# Altium PCB Terra_Spray.PcbDoc
Units mm, origin at the board's own origin, x right, y up, seen from the top; angles counter-clockwise.
Board outline 45.2 x 39.03 mm, 4 copper layers (Top Layer, GND, Power, Bottom Layer), stack 1.57 mm thick; 61 components, 32 nets, 213 pads, 377 vias.
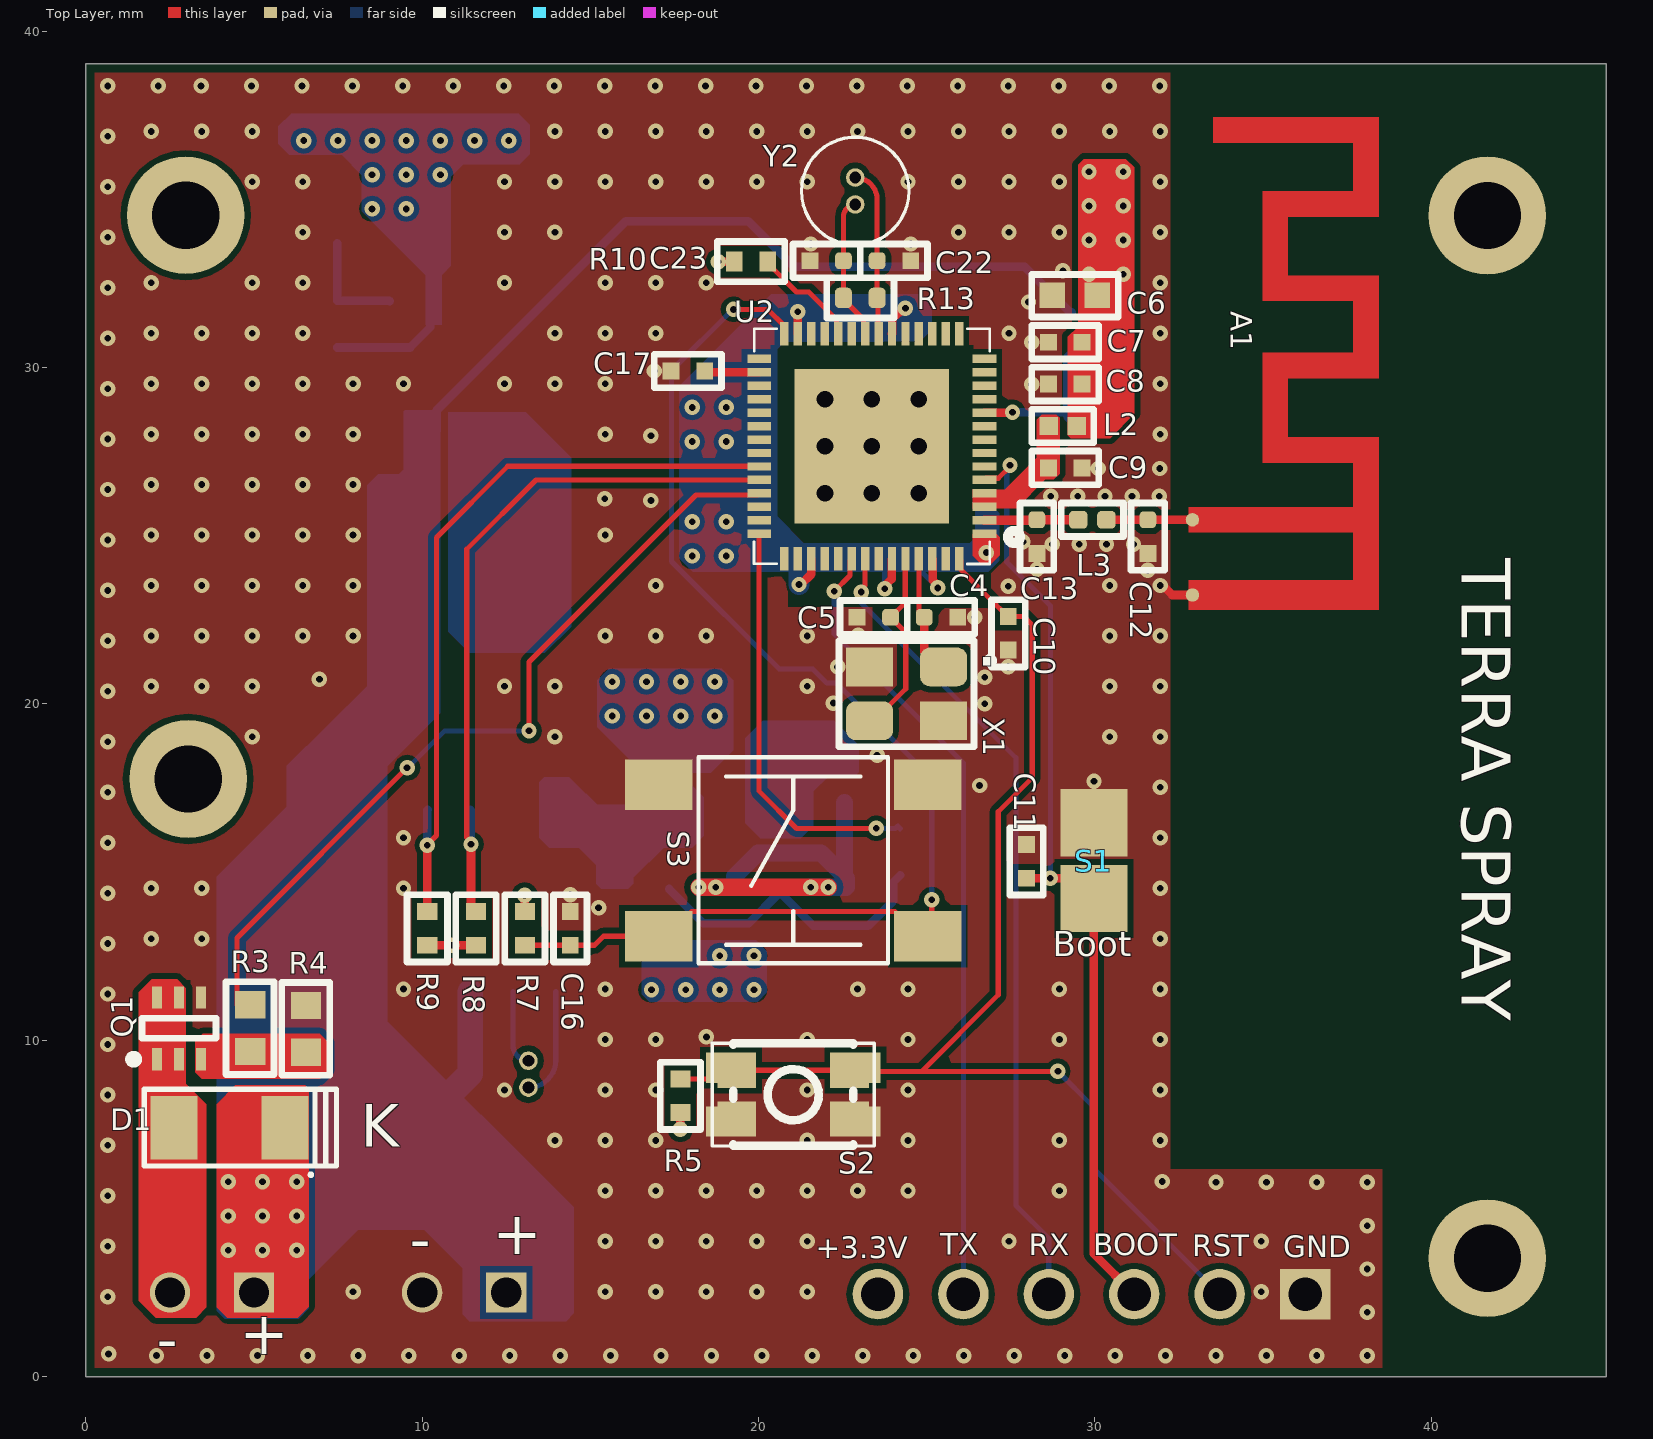
[diagram p0: Top Layer view]
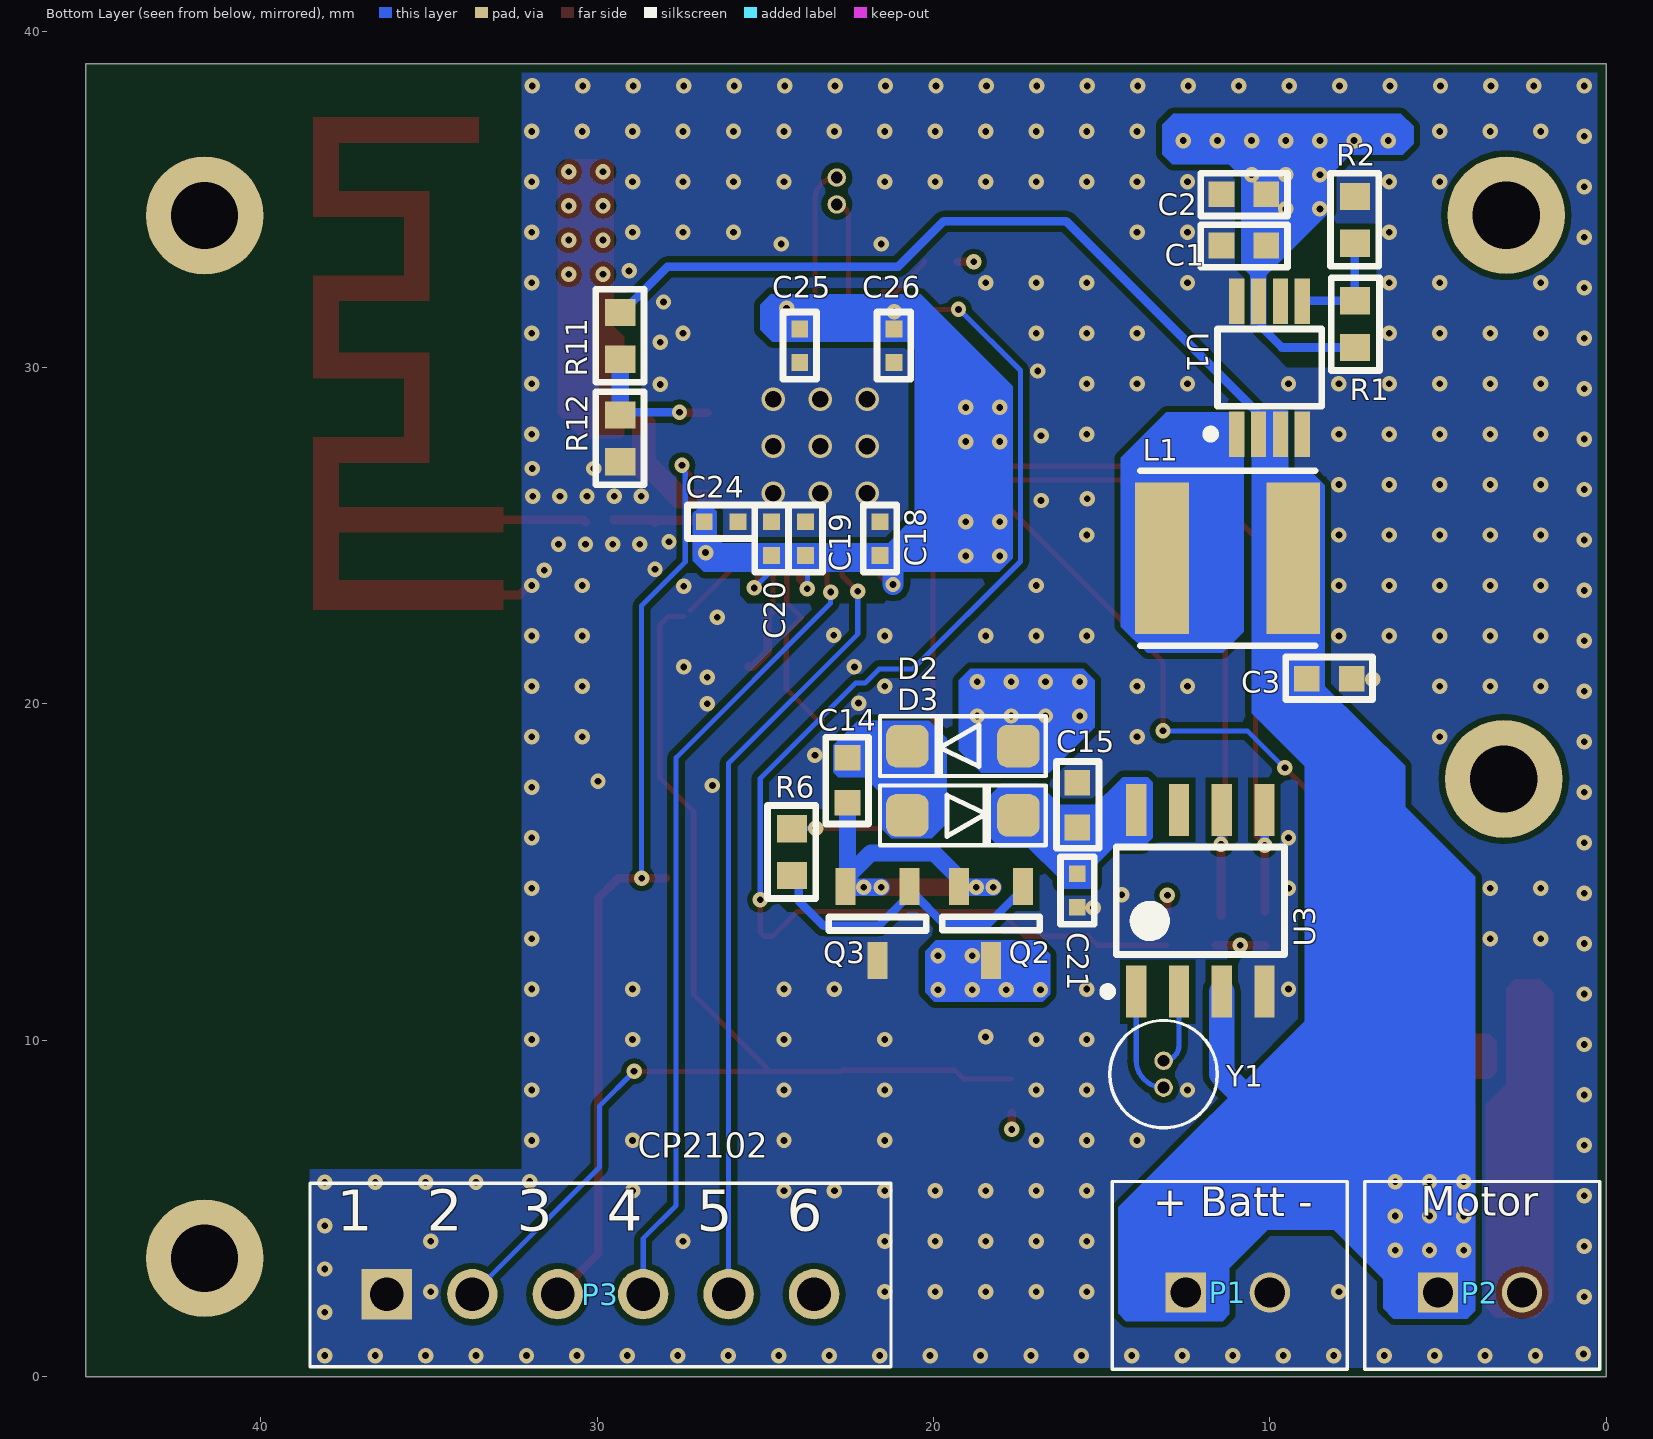
[diagram p1: Bottom Layer view, seen from below]
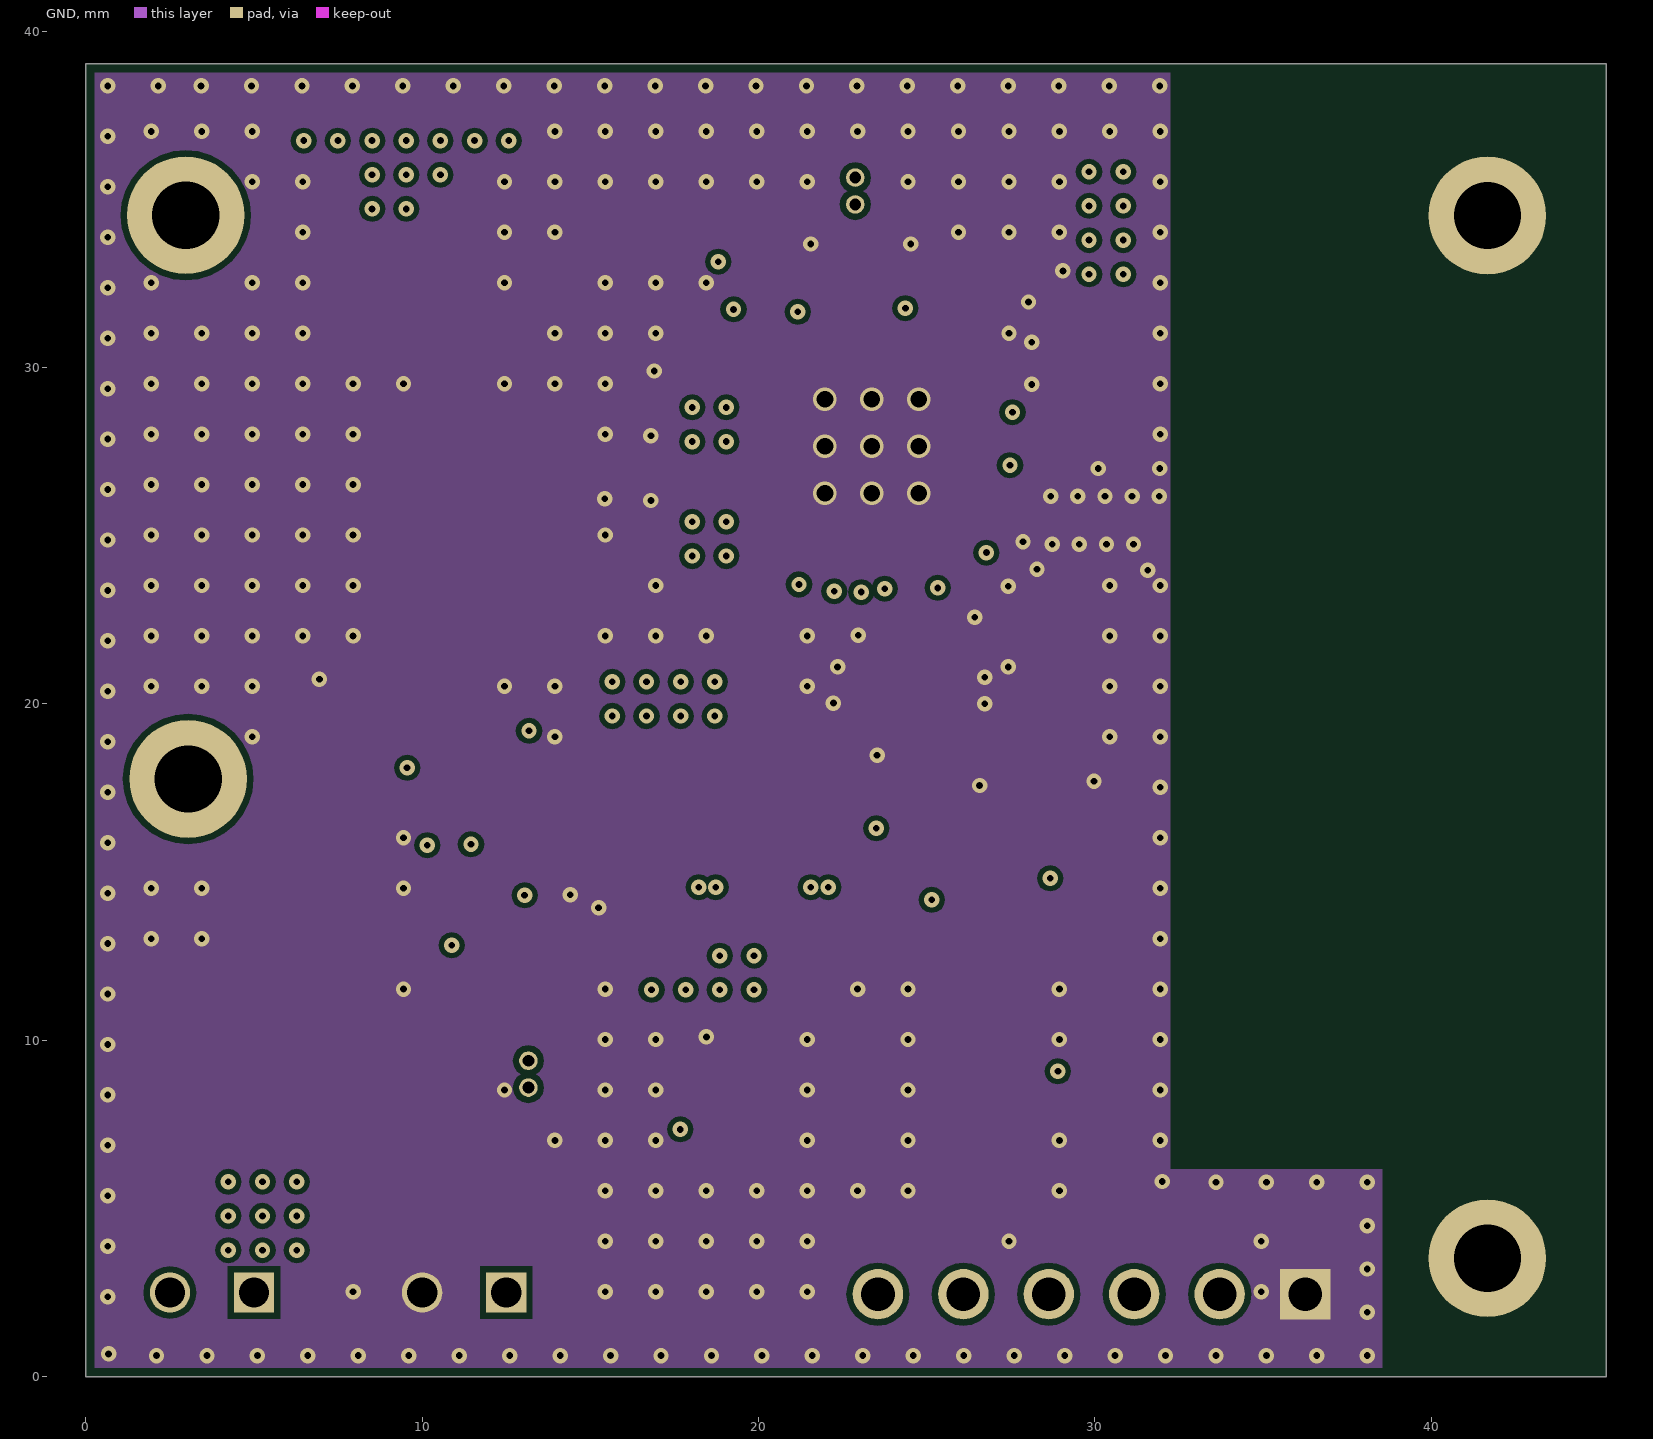
[diagram p2: GND]
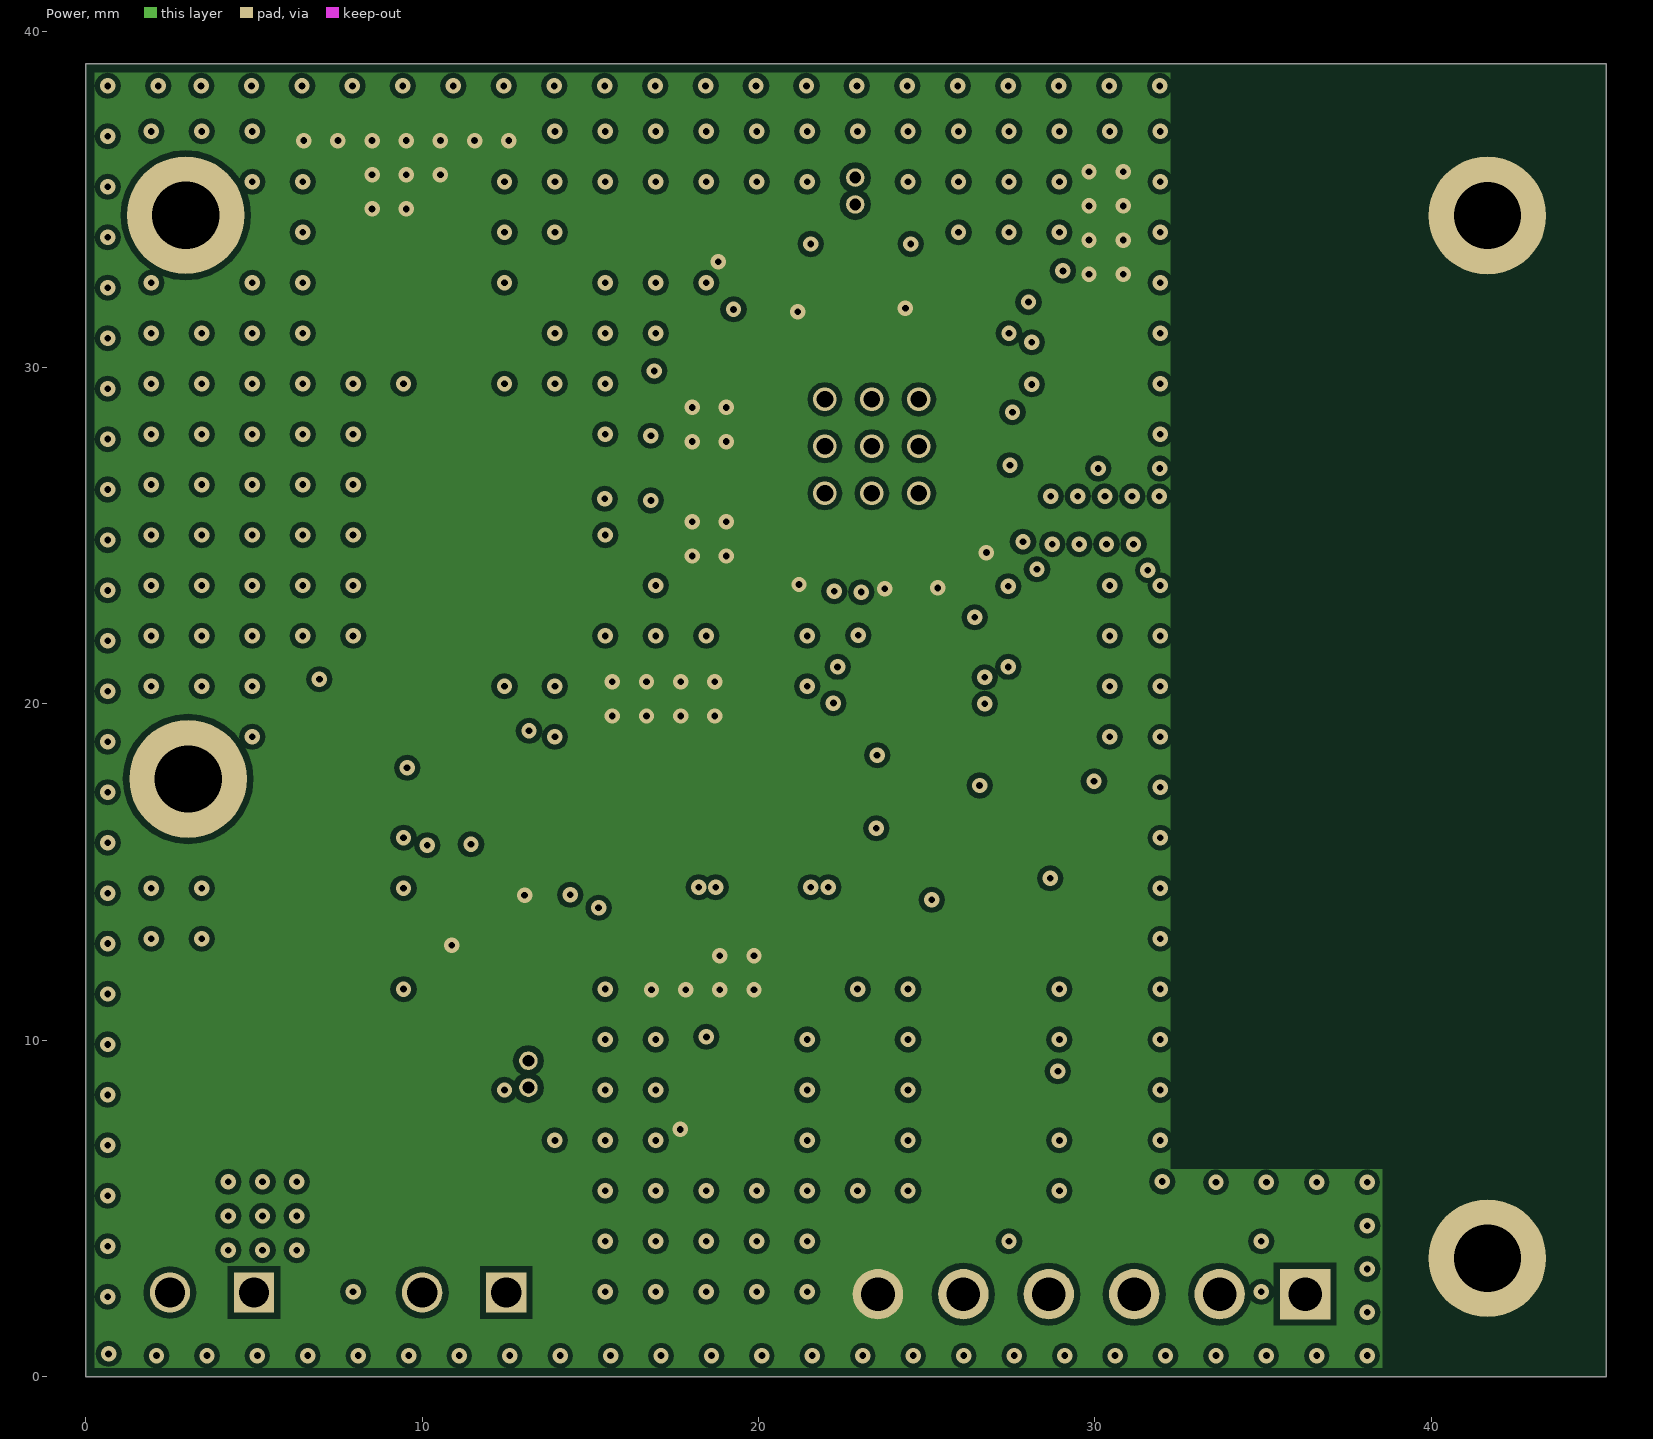
[diagram p3: Power]

## Layer stack, top to bottom
Top Solder: solder mask 0.0102, Solder Resist, Dk 3.5
Top Layer: signal copper 0.035
Dielectric 2: prepreg 0.0175, PP-006, Dk 4.1
GND: signal copper 0.2
Dielectric 1: dielectric 1.065, FR-4, Dk 4.8
Power: signal copper 0.2
Dielectric 3: prepreg 0.0175, PP-006, Dk 4.1
Bottom Layer: signal copper 0.035
Bottom Solder: solder mask 0.0102, Solder Resist, Dk 3.5

## Board outline
0,0 0,39.03 45.2,39.03 45.2,0

## Design rules (kind name [scope] priority, off if disabled: settings)
BoardOutlineClearance [All] p1: gap=0.254 ignorepadtopadclearanceinfootprint=FALSE except(0: Arc-SplitContinuation Track-SplitContinuation SMDPad-SplitContinuation THPad-SplitContinuation Via-SplitContinuation Fill-SplitContinuation Poly-SplitContinuation Region-SplitContinuation Text-SplitContinuation)
Clearance [All] p1: gap=0.178 ignorepadtopadclearanceinfootprint=TRUE except(0.127: Arc-SMDPad Track-SMDPad; 0.152: Track-Track Track-Region SMDPad-Region Via-Poly; 0.254: Arc-Arc Arc-Track)
MinimumSolderMaskSliver [All] p1: minsoldermaskwidth=0.025
PolygonConnect [All] p1: connectstyle=Direct reliefconductorwidth=0.254 reliefentries=4 polygonreliefangle="90 Angle" airgapwidth=0.254
RoutingVias [All] p1: holewidth=0.356 width=0.711 viastyle="Through Hole" minholewidth=0.2 minwidth=0.457 maxholewidth=0.711 maxwidth=1.27
SilkToSilkClearance [All] p1: silktosilkclearance=0.025
SilkToSolderMaskClearance [IsPad] p1: minsilkscreentomaskgap=0 clearancetoexposedcopper=TRUE
SolderMaskExpansion [All] p1: expansion=0.102 istentingtop=FALSE
Width [All] p1: maxlimit=1.016 minlimit=0.152 preferedwidth=0.152 minimp=50.000000 maximp=50.000000 favimp=50.000000
27 further rules are at their usual default settings.

## Components (designator, comment, footprint, x,y, rotation, side; value= is the part's Value field where it differs from the comment)
A1 "Antenna_1" "ESP32 ANT" 32.9,24.357 r270 top
C1 "Capacitor" CAPC0603 10.77,33.63 r180 bottom value=22uF
C2 "Capacitor" CAPC0603 10.77,35.154 r180 bottom value=22uF
C3 "Capacitor" CAPC0603 8.23,20.752 r0 bottom value=22uF
C4 "Cap" CAPC0402#1 25.425,22.575 r180 top value=22pF
C5 "Cap" CAPC0402#1 23.425,22.575 r0 top value=22pF
C6 "Capacitor" CAPC0603 29.4,32.15 r0 top value=10uF
C7 "Capacitor" CAPC0402#2 29.119,30.753 r0 top value=1uF
C8 "Cap" CAPC0402#2 29.119,29.508 r0 top value=100nF
C9 "Cap" CAPC0402#2 29.119,27.019 r0 top value=100nF
C10 "Cap" CAPC0402#2 27.426,22.099 r270 top value=100nF
C11 "Cap" CAPC0402#2 27.965,15.316 r270 top value=100nF
C12 "Capacitor" CAPC0402#1 31.575,24.975 r90 top
C13 "Capacitor" CAPC0402#1 28.275,24.975 r90 top
C14 "Capacitor" CAPC0603 22.555,17.729 r270 bottom value=10uF
C15 "Capacitor" CAPC0603 15.723,16.993 r90 bottom value=10uF
C16 "Cap" CAPC0402#2 14.402,13.325 r270 top value=100nF
C17 "Cap" CAPC0402#2 17.9,29.9 r180 top value=100nF
C18 "Cap" CAPC0402#2 21.59,24.917 r90 bottom value=100nF
C19 "Cap" CAPC0402#2 23.8,24.917 r90 bottom value=100nF
C20 "Cap" CAPC0402#2 24.816,24.917 r90 bottom value=100nF
C21 "Cap" CAPC0402#2 15.723,14.453 r270 bottom value=100nF
C22 "Cap" capc0402 24.025,33.175 r180 top value=18pF
C23 "Cap" capc0402 22.025,33.175 r0 top value=18pF
C24 "Cap" CAPC0402#2 26.314,25.417 r180 bottom value=100nF
C25 "Cap" CAPC0402#2 23.975,30.65 r270 bottom value=100nF
C26 "Cap" CAPC0402#2 21.175,30.65 r270 bottom value=100nF
D1 "1N4007W" SOD-123 4.275,7.4 r180 top
D2 "B0540W" "SOD123 - DUPLICATE" 19.126,18.745 r0 bottom
D3 "B0540W" "SOD123 - DUPLICATE" 19.126,16.688 r180 bottom
L1 "Inductor" INDP5050X20N 11.252,24.333 r0 bottom value=2.2uH-3A
L2 "Inductor" "INDUCTOR 0402"#1 29.044,28.264 r0 top
L3 "Inductor" "INDUCTOR 0402"#2 29.925,25.475 r0 top
P1 "+ Batt -" "2 PIN 2.5MM - HEADER" 11.25,2.5 r180 bottom
P2 "Motor" "2 PIN 2.5MM - HEADER" 3.75,2.5 r180 bottom locked
P3 "CP2102" "HEADER 6X1" 29.9,2.45 r180 bottom
Q1 "Mosfet" SOT-363 2.768,10.356 r90 top
Q2 "NPN BJT Transistor" SOT-23 18.288,13.473 r270 bottom
Q3 "PNP BJT Transistor" SOT-23 21.666,13.465 r270 bottom
R1 "Resistor" RESC0603 7.468,31.293 r270 bottom value=453K
R2 "Resistor" RESC0603 7.468,34.393 r90 bottom value=100K
R3 "Resistor" RESC0603 4.89,10.362 r90 top value=100E
R4 "Resistor" RESC0603 6.547,10.338 r90 top value=100K
R5 "Resistor" RESC0402#1 17.675,8.35 r90 top value=10K
R6 "Resistor" RESC0603 24.206,15.596 r90 bottom value=820E
R7 "Resistor" RESC0402#1 13.051,13.325 r270 top value=10K
R8 "Resistor" RESC0402#1 11.601,13.325 r90 top value=10K
R9 "Resistor" RESC0402#1 10.15,13.325 r90 top value=10K
R10 "Resistor" RESC0402#1 19.775,33.15 r180 top value=10K
R11 "Resistor" RESC0603 29.311,30.946 r90 bottom value=220K
R12 "Resistor" RESC0603 29.311,27.898 r90 bottom value=309K
R13 "Resistor" RESC0402#2 23.025,32.075 r0 top value=1M
S1 "Boot" ? 29.972,15.342 r270 top
S2 "Button" 434153017835 21.031,8.382 r180 top locked value=RESET
S3 "WIFI" "FSMJ - SMD - WIFI" 21.031,15.342 r90 top
U1 "PAM2401SCADJ" "8-TSSOP, 8-MSOP" 10.008,29.997 r90 bottom
U2 "ESP32-S2" QFN56-7X7MM 23.368,27.661 r180 top
U3 "DS1307Z+" SOIC-8 12.065,14.148 r90 bottom
X1 "CRYSTAL_1" CRYSTAL_3225 24.4,20.3 r180 top
Y1 "32.768KHz" 32.728KHZ 13.157,8.992 r270 bottom
Y2 "32.768KHz" 32.728KHZ 22.875,35.25 r270 top

## Footprints (in the part's own frame and the unit in brackets; to place one, negate y for a bottom-side part, rotate by r counter-clockwise, add the part's x,y. Pads: shape width x height; smd on the part's side, far side on the other; paste and mask are expansions set on the pad)
"2 PIN 2.5MM - HEADER" [mm]
  rect 1.2x1.2 hole 0.9: 1(-1.25,0)
  round 1.2 hole 0.9: 2(1.25,0)
  silkscreen extent -3.43,-2.29 3.56,3.3, body extent -2.54,-1.27 2.54,1.27, height 8.49
"8-TSSOP, 8-MSOP" [mm] "TSOP, 8-Leads, Body 3.00x3.00mm, Pitch 0.65mm, IPC Medium Density"
  rect 1.35x0.45 smd: 1(-1.975,0.975) 2(-1.975,0.325) 3(-1.975,-0.325) 4(-1.975,-0.975) 5(1.975,-0.975) 6(1.975,-0.325) 7(1.975,0.325) 8(1.975,0.975)
  silkscreen extent -2.1,-1.55 1.15,1.88, body extent -2.45,-1.55 2.45,1.55, height 1.1
32.728KHZ [mm]
  round 0.55 hole 0.35: 1(-0.4,0) 2(0.4,0)
  silkscreen extent -1.6,-1.6 1.6,1.6, body extent -1.46,-1.47 1.48,1.47, height 8.05
434153017835 [mm]
  rect 1.1x0.9 smd: 1(-2.05,-0.8) 2(-2.05,0.8) 3(2.05,-0.8) 4(2.05,0.8)
  rect 1.15x1.05 smd: 1(-1.675,-0.725) 2(-1.675,0.725) 3(1.675,-0.725) 4(1.675,0.725)
  silkscreen extent -2.41,-1.52 2.41,1.52, body extent -2.3,-1.5 2.3,1.5, height 2.1
CAPC0402#1 [mm]
  rect 0.5x0.5 smd: 1(-0.5,0)
  rrect50% 0.5x0.5 smd: 2(0.5,0)
  silkscreen extent -1,-0.5 1,0.5, body extent -0.5,-0.25 0.5,0.25, height 0.56
CAPC0402#2 [mm]
  rect 0.5x0.5 smd: 1(-0.5,0) 2(0.5,0)
  silkscreen extent -1,-0.5 1,0.5, body extent -0.5,-0.25 0.5,0.25, height 0.56
capc0402 [mm]
  rect 0.5x0.5 smd: 1(-0.5,0)
  rrect50% 0.5x0.5 smd: 2(0.5,0)
  silkscreen extent -1,-0.5 1,0.5, body extent -0.5,-0.25 0.5,0.25, height 0.56
CAPC0603 [mil]
  rect 30x30 smd: 1(-26.26,0) 2(26.26,0)
  silkscreen extent -50,-25 51,24, body extent -31,-16 31,16, height 12
CRYSTAL_3225 [mm] "3225 pack"
  rrect50% 1.4x1.15 smd: 1(-1.1,-0.8) 3(1.1,0.8)
  rect 1.4x1.15 smd: 2(1.1,-0.8) 4(-1.1,0.8)
  silkscreen extent -2.59,-1.57 2.01,1.57, body extent -1.6,-1.23 1.6,1.27, height 0.6
"ESP32 ANT" [mm]
  round 0.4 smd paste-0.2: 1(-1.118,0) 2(1.118,0)
  Top Layer region: -1.495,-0.114 -0.741,-0.114 -0.741,4.786 0.678,4.786 0.678,-0.114 1.559,-0.114 1.559,5.54 -3.569,5.54 -3.569,2.84 -5.326,2.84 -5.326,5.54 -8.38,5.54 -8.38,2.84 -10.126,2.84 -10.126,5.54 -13.08,5.54 -13.08,0.612 -12.326,0.612 -12.326,4.786 -10.88,4.786 -10.88,2.086 -7.626,2.086 -7.626,4.786 -6.08,4.786 -6.08,2.086 -2.815,2.086 -2.815,4.786 -1.495,4.786 -1.495,-0.114
"FSMJ - SMD - WIFI" [mm]
  rect 1.5x2 smd: 1(2.25,4) 2(2.25,-4) 3(-2.25,4) 4(-2.25,-4)
  silkscreen extent -3.05,-2.82 3.07,2.82, body extent -3,-4.5 3,4.5, height 5.1
"HEADER 6X1" [mm]
  rect 1.5x1.5 hole 1: 1(-6.35,0)
  round 1.5 hole 1: 2(-3.81,0) 3(-1.27,0) 4(1.27,0) 5(3.81,0) 6(6.35,0)
  silkscreen extent -8.64,-2.16 8.64,3.3, body extent -7.62,-1.27 7.62,1.27, height 8.59
INDP5050X20N [mm] "Precision Wire Wound Inductor, 2-Leads, Body 5.00x5.00mm, IPC Medium Density"
  rect 1.6x4.5 smd: 1(-1.95,0) 2(1.95,0)
  silkscreen extent -2.6,-2.6 2.6,2.6, body extent -2.6,-2.5 2.6,2.5, height 2.1
"INDUCTOR 0402"#1 [mm]
  rect 0.55x0.53 smd: 1(0.419,0) 2(-0.419,0)
  silkscreen extent -0.92,-0.5 0.92,0.5, body extent -0.5,-0.25 0.5,0.25, height 0.55
"INDUCTOR 0402"#2 [mm]
  rrect50% 0.55x0.53 smd: 1(0.419,0) 2(-0.419,0)
  silkscreen extent -0.92,-0.5 0.92,0.5, body extent -0.5,-0.25 0.5,0.25, height 0.55
QFN56-7X7MM [mm]
  rect 0.7x0.25 smd: 1(-3.35,2.6) 2(-3.35,2.2) 3(-3.35,1.8) 4(-3.35,1.4) 5(-3.35,1) 6(-3.35,0.6) 7(-3.35,0.2) 8(-3.35,-0.2) 9(-3.35,-0.6) 10(-3.35,-1) 11(-3.35,-1.4) 12(-3.35,-1.8) 13(-3.35,-2.2) 14(-3.35,-2.6) 29(3.35,-2.6) 30(3.35,-2.2) 31(3.35,-1.8) 32(3.35,-1.4) 33(3.35,-1) 34(3.35,-0.6) 35(3.35,-0.2) 36(3.35,0.2) 37(3.35,0.6) 38(3.35,1) 39(3.35,1.4) 40(3.35,1.8) 41(3.35,2.2) 42(3.35,2.6)
  rect 0.25x0.7 smd: 15(-2.6,-3.35) 16(-2.2,-3.35) 17(-1.8,-3.35) 18(-1.4,-3.35) 19(-1,-3.35) 20(-0.6,-3.35) 21(-0.2,-3.35) 22(0.2,-3.35) 23(0.6,-3.35) 24(1,-3.35) 25(1.4,-3.35) 26(1.8,-3.35) 27(2.2,-3.35) 28(2.6,-3.35) 43(2.6,3.35) 44(2.2,3.35) 45(1.8,3.35) 46(1.4,3.35) 47(1,3.35) 48(0.6,3.35) 49(0.2,3.35) 50(-0.2,3.35) 51(-0.6,3.35) 52(-1,3.35) 53(-1.4,3.35) 54(-1.8,3.35) 55(-2.2,3.35) 56(-2.6,3.35)
  rect 4.6x4.6 smd: 57(0,0)
  silkscreen extent -4.4,-3.5 3.5,3.5, body extent -3.5,-3.5 3.5,3.5, height 0.75
RESC0402#1 [mm]
  rect 0.5x0.6 smd: 1(0.5,0) 2(-0.5,0)
  silkscreen extent -1,-0.6 1,0.6, body extent -0.5,-0.25 0.5,0.25, height 0.4
RESC0402#2 [mm]
  rrect50% 0.5x0.6 smd: 1(0.5,0) 2(-0.5,0)
  silkscreen extent -1,-0.6 1,0.6, body extent -0.5,-0.25 0.5,0.25, height 0.4
RESC0603 [mm]
  rect 0.81x0.9 smd: 1(-0.695,0) 2(0.695,0)
  silkscreen extent -1.38,-0.71 1.38,0.73, body extent -0.8,-0.4 0.8,0.4, height 0.45
"SOD123 - DUPLICATE" [mil]
  rrect50% 50x50 smd: A(-65,0) K(65,0)
  silkscreen extent -97,-35 97,35, body extent -77,-35 77,35, height 47
SOD-123 [mm] "SODFL, 2-Leads, Body 1.70x3.70mm, IPC Medium Density"
  rect 1.4x1.9 smd: 1(-1.65,0) 2(1.65,0)
  silkscreen extent -3.17,-1.14 2.54,1.45, body extent -1.85,-0.95 1.85,0.95, height 1.7
SOIC-8 [mm] "SOIC, 8-Leads, Body 4.91x3.90mm, Pitch 1.27mm, IPC Medium Density"
  rect 1.55x0.6 smd: 1(-2.7,1.905) 2(-2.7,0.635) 3(-2.7,-0.635) 4(-2.7,-1.905) 5(2.7,-1.905) 6(2.7,-0.635) 7(2.7,0.635) 8(2.7,1.905)
  silkscreen extent -2.82,-2.5 1.6,2.88, body extent -3,-2.5 3,2.5, height 1.75
SOT-23 [mm]
  rect 1.1x0.6 smd: 1(-1.1,0.95) 2(-1.1,-0.95) 3(1.1,0)
  silkscreen extent -0.2,-1.45 0.2,1.45, body extent -1.42,-1.5 1.42,1.5, height 1.2
SOT-363 [mm] "SOT23, 6-Leads, Body 2.00x2.10mm, Pitch 0.65mm, IPC Medium Density"
  rect 0.66x0.3 smd: 1(-0.92,0.65) 2(-0.92,0) 3(-0.92,-0.65) 4(0.92,-0.65) 5(0.92,0) 6(0.92,0.65)
  silkscreen extent -1.04,-1.1 0.3,1.47, body extent -1.1,-1.1 1.1,1.1, height 1.1
? [mm]
  rect 2x2 smd: 1(-1.125,0) 2(1.125,0)

## Part data
A1: "PCB Antenna", LatestRevisionDate=17-Jul-2002, LatestRevisionNote="Re-released for DXP Platform.", PackageReference=PIN1, Published=24-Mar-1999, Publisher="Altium Limited"
C1 C2 C3: "Ceramic Capacitor,22uF,0603,6.3V", Case/Package=0603
C4 C5: "Ceramic Capacitor,22pF,0402,50V", Case/Package=0402
C6 C14 C15: "Ceramic Capacitor,10uF,0603,10V", Case/Package=0603
C7: "Ceramic Capacitor,1uF,0402,6.3V", Case/Package=0402
C8: library part Capacitor, "Ceramic Capacitor,100nF,0402,6.3V", Case/Package=0402
C9 C10 C17 C18 C19 C20 C24 C25 C26: "Ceramic Capacitor,100nF,0402,6.3V", Case/Package=0402
C11: "Ceramic Capacitor,100nF,0402,16V", Case/Package=0402
C12 C13: Case/Package=0402
C16 C21: "Ceramic Capacitor,100nF,0402,6.3 / V", Case/Package=0402
C22 C23: "Ceramic Capacitor,18pF,0402,50V", Case/Package=0402
D1: library part BAT54HT1G, "Rectifiers RECTIFIER DIODE 1A 1000V", Part No=CGRM4007-G, ComponentLink1Description=http://www.fairchildsemi.com/ds/BA/BAT54HT1G.pdf, ComponentLink1URL=http://www.fairchildsemi.com/ds/BA/BAT54HT1G.pdf
D2 D3: library part Diode, "Diode Schottky 40V 0.5A 2-Pin SOD-123 T/R", Average Rectified Current=500mA, Forward Voltage=620mV, Manufacturer 1=Diodes, Max Forward Surge Current (Ifsm)=5.5A, Max Operating Temperature=150°C, Max Power Dissipation=410mW, Max Repetitive Reverse Voltage (Vrrm)=40V, Max Reverse Current=20uA, Min Operating Temperature=-65°C, Package Quantity=3000, Element Configuration=Single, Forward Current=500mA, Height=1.25mm, Lead Free="Lead Free", Length=2.85mm, Manufacturer Part Number=B0540W, Max Reverse Voltage (DC)=40V, Mount="Surface Mount", Number of Pins=2, Output Current=500mA
L1: library part 74404052022, "WURTH ELEKTRONIK - 74404052022 - Power Inductor (SMD), 2.2 µH, 3 A, Semishielded, 3.6 A, WE-LQS Series, 5mm x 5mm x 2mm", Case/Package=Nonstandard, Current Rating=3A, DC Resistance (DCR)=31.6mR, Inductance=2.2uH, Manufacturer 1="Wurth Electronics", Max Operating Temperature=125°C, Min Operating Temperature=-40°C, Resistor Type=Wirewound, Saturation Current=3.6A, Self Resonant Frequency=88MHz, Test Frequency=100kHz, Tolerance=30%, ComponentLink1Description=http://www.farnell.com/datasheets/2618696.pdf?src-supplier=Farnell, ComponentLink1URL=http://www.farnell.com/datasheets/2618696.pdf?src-supplier=Farnell, ComponentLink2Description=https://katalog.we-online.de/pbs/datasheet/74404052022.pdf?src-supplier=Digi-Key, ComponentLink2URL=https://katalog.we-online.de/pbs/datasheet/74404052022.pdf?src-supplier=Digi-Key, ComponentLink3Description=http://www.farnell.com/datasheets/2618696.pdf?src-supplier=Newark, ComponentLink3URL=http://www.farnell.com/datasheets/2618696.pdf?src-supplier=Newark, DigiKey=732-7241-1-ND, Height - Seated (Max)=0.079inch, Length=0.197inch, Mount="Surface Mount", P/N=74404052022, Packaging="Tape and Reel", Pricing 1="1=1.23000, 50=1.13100, 250=1.06400, 500=0.95200, 1000=0.78400 (USD)", RoHS=Yes, Shielding=Shielded, Stock 1=1338, Supplier 1=Digi-Key, Width=0.197inch
L2 L3: "2nH ±0.3nH 900mA 120mΩ 0402 Inductors (SMD) RoHS", Case Code (Imperial)=0402, Case Code (Metric)=1005, Current=900mA, DC Resistance (DCR)=120mR, Inductance=2nH, Manufacturer 1=Murata, Manufacturer Part Number=LQG15HN2N0S02D, Max Operating Temperature=125°C, Min Operating Temperature=-55°C, Package Quantity=10000, Self Resonant Frequency=6GHz, Supplier Part Number 1=C97984, Test Frequency=100MHz, Case/Package=0402, Category 1="Fixed Inductors", ComponentLink1Description=https://datasheet.ciiva.com/11799/0900766b8090d3b8-11799042.pdf?src-supplier=RSComponents, ComponentLink1URL=https://datasheet.ciiva.com/11799/0900766b8090d3b8-11799042.pdf?src-supplier=RSComponents, ComponentLink2Description=https://datasheet.ciiva.com/4976/o05e-4976477.pdf?src-supplier=Mouser, ComponentLink2URL=https://datasheet.ciiva.com/4976/o05e-4976477.pdf?src-supplier=Mouser, ComponentLink3Description=https://datasheet.ciiva.com/8510/l0075s0083lqg15hn-8510907.pdf?src-supplier=Avnet, ComponentLink3URL=https://datasheet.ciiva.com/8510/l0075s0083lqg15hn-8510907.pdf?src-supplier=Avnet, ComponentLink4Description=https://datasheet.ciiva.com/17279/l0075s0083lqg15hn-17279196.pdf?src-supplier=Avnet+Europe, ComponentLink4URL=https://datasheet.ciiva.com/17279/l0075s0083lqg15hn-17279196.pdf?src-supplier=Avnet+Europe, Core Material=Air, Current Rating=900mA, DC Current=900mA, Depth=0.55mm, Description 1="Fixed Inductors 0402 2.0nH", Height=0.5mm, Height - Seated (Max)=0.022inch, Length=1mm, Max DC Current=900mA, Military Standard=Not, Mount="Surface Mount", Number of Pins=2, Packaging="Tape and Reel", Pricing 1="50=0.00840, 500=0.00620, 1500=0.00580, 5000=0.00540, 25000=0.00520, 50000=0.00520, 50=0.00810, 500=0.00600, 1500=0.00560, 5000=0.00520, 25000=0.00500, 50000=0.00500, 50=0.04180, 500=0.03090, 1500=0.02890, 5000=0.02690, 25000=0.02600, 50000=0.02550, 50=0.03860, 500=0.02850, 1500=0.02670, 5000=0.02480, 25000=0.02400, 50000=0.02360, 50=0.00520, 500=0.00380, 1500=0.00360, 5000=0.00330, 25000=0.00320, 50000=0.00320, 50=0.00480, 500=0.00350, 1500=0.00330, 5000=0.00310, 25000=0.00300, 50000=0.00290, 50=0.04770, 500=0.03530, 1500=0.03300, 5000=0.03070, 25000=0.02970, 50000=0.02920, 50=0.65070, 500=0.48080, 1500=0.44960, 5000=0.41830, 25000=0.40450, 50000=0.39760, 50=0.02550, 500=0.01880, 1500=0.01760, 5000=0.01640, 25000=0.01580, 50000=0.01560, 50=0.46320, 500=0.34230, 1500=0.32010, 5000=0.29780, 25000=0.28800, 50000=0.28310, 50=0.05400, 500=0.03990, 1500=0.03730, 5000=0.03470, 25000=0.03360, 50000=0.03300, 50=0.00840, 500=0.00620, 1500=0.00580, 5000=0.00540, 25000=0.00520, 50000=0.00510, 50=0.00616, 500=0.00455, 1500=0.00426, 5000=0.00396, 25000=0.00383, 50000=0.00376 (AUD)", Q Factor=8, Radiation Hardening=No, REACH SVHC="No SVHC", RoHS 1=Yes, Shielding=Unshielded, Stock 1=84500, Supplier 1=LCSC, Termination=SMD/SMT, Width=0.02inch
P1 S1: library part "Header 2", "Header, 2-Pin", LatestRevisionDate=17-Jul-2002, LatestRevisionNote="Re-released for DXP Platform.", Publisher="Altium Limited"
P2: "Motor, General Kind", LatestRevisionDate=17-Jul-2002, LatestRevisionNote="Re-released for DXP Platform.", PackageDescription="Capacitor (Radial); 2 Leads", PackageReference=RB5-10.5, Published=24-Mar-1999, Publisher="Altium Limited"
P3: library part "Header 6", "Header, 6-Pin", LatestRevisionDate=17-Jul-2002, LatestRevisionNote="Re-released for DXP Platform.", Publisher="Altium Limited"
Q1: library part NTJS3157NT1G, "N-Channel 20V 3.2A (Ta) 1W (Ta) Surface Mount SC-88/SC70-6/SOT-363", Part No=NTJS3157NT1G
Q2: "Bipolar Transistors - BJT SOT-23 NPN", Case/Package=SOT-23, Current Rating=200mA, Manufacturer Part Number=MMBT3904, Max Breakdown Voltage=40V, Max Power Dissipation=350mW, Min Operating Temperature=-55°C, Category=BJTs, ComponentLink1Description=https://datasheet.ciiva.com/971/mmbt3904-971892.pdf?src-supplier=Digi-Key, ComponentLink1URL=https://datasheet.ciiva.com/971/mmbt3904-971892.pdf?src-supplier=Digi-Key, ComponentLink2Description=https://datasheet.ciiva.com/971/mmbt3904-971893.pdf?src-supplier=Digi-Key, ComponentLink2URL=https://datasheet.ciiva.com/971/mmbt3904-971893.pdf?src-supplier=Digi-Key, ComponentLink3Description=https://datasheet.ciiva.com/22653/1922793-22653482.pdf?src-supplier=Element14, ComponentLink3URL=https://datasheet.ciiva.com/22653/1922793-22653482.pdf?src-supplier=Element14, ComponentLink4Description=https://datasheet.ciiva.com/971/mmbt3904-971891.pdf?src-supplier=Digi-Key, ComponentLink4URL=https://datasheet.ciiva.com/971/mmbt3904-971891.pdf?src-supplier=Digi-Key, ComponentLink5Description=https://datasheet.ciiva.com/26237/mmbt3904-26237242.pdf?src-supplier=Avnet+Europe, ComponentLink5URL=https://datasheet.ciiva.com/26237/mmbt3904-26237242.pdf?src-supplier=Avnet+Europe, ComponentLink6Description=https://datasheet.ciiva.com/7972/2n3904-7972669.pdf?src-supplier=Element14, ComponentLink6URL=https://datasheet.ciiva.com/7972/2n3904-7972669.pdf?src-supplier=Element14, ComponentLink7Description=https://datasheet.ciiva.com/16850/mmbt3904-16850397.pdf?src-supplier=Future+Electronics, ComponentLink7URL=https://datasheet.ciiva.com/16850/mmbt3904-16850397.pdf?src-supplier=Future+Electronics, ComponentLink8Description=https://datasheet.ciiva.com/11201/mmbt3904-11201775.pdf?src-supplier=Avnet, ComponentLink8URL=https://datasheet.ciiva.com/11201/mmbt3904-11201775.pdf?src-supplier=Avnet, Max Collector Current=200mA, Mount="Surface Mount", Polarity=NPN, Power Dissipation=350mW, Termination=SMD/SMT
Q3: "ON SEMICONDUCTOR - MMBT3906LT1G - Bipolar (BJT) Single Transistor, General Purpose, PNP, -40 V, 250 MHz, 225 mW, -200 mA, 300 hFE", Case/Package=SOT-23-3, Collector Base Voltage (VCBO)=40V, Collector Emitter Saturation Voltage=-400mV, Current Rating=-200mA, Emitter Base Voltage (VEBO)=5V, Frequency=250MHz, Manufacturer="ON Semiconductor", Manufacturer Part Number=MMBT3906, Max Collector Current=200mA, Max Operating Temperature=150°C, Max Power Dissipation=300mW, Min Operating Temperature=-55°C, Package Quantity=1, Voltage Rating (DC)=-40V, Category=BJTs, Collector Emitter Breakdown Voltage=40V, Collector Emitter Voltage (VCEO)=40V, ComponentLink1Description="Manufacturer Link", ComponentLink1URL=http://www.fairchildsemi.com/, ComponentLink2Description=Datasheet, ComponentLink2URL=http://www.fairchildsemi.com/ds/2N%2F2N3906.pdf, ComponentLink3Description=https://datasheet.ciiva.com/22664/1708270-22664162.pdf?src-supplier=Element14, ComponentLink3URL=https://datasheet.ciiva.com/22664/1708270-22664162.pdf?src-supplier=Element14, ComponentLink4Description=https://datasheet.ciiva.com/25998/mmbt3906lt1-d-25998821.pdf?src-supplier=Avnet+Europe, ComponentLink4URL=https://datasheet.ciiva.com/25998/mmbt3906lt1-d-25998821.pdf?src-supplier=Avnet+Europe, ComponentLink5Description=https://datasheet.ciiva.com/976/mmbt3906lt1-d-976359.pdf?src-supplier=Digi-Key, ComponentLink5URL=https://datasheet.ciiva.com/976/mmbt3906lt1-d-976359.pdf?src-supplier=Digi-Key, ComponentLink6Description=https://datasheet.ciiva.com/16387/mmbt3906lt1-d-16387191.pdf?src-supplier=Future+Electronics, ComponentLink6URL=https://datasheet.ciiva.com/16387/mmbt3906lt1-d-16387191.pdf?src-supplier=Future+Electronics, ComponentLink7Description=https://datasheet.ciiva.com/976/mmbt3906lt1-d-976360.pdf?src-supplier=Digi-Key, ComponentLink7URL=https://datasheet.ciiva.com/976/mmbt3906lt1-d-976360.pdf?src-supplier=Digi-Key, ComponentLink8Description=https://datasheet.ciiva.com/976/mmbt3906lt1-d-976361.pdf?src-supplier=Digi-Key, ComponentLink8URL=https://datasheet.ciiva.com/976/mmbt3906lt1-d-976361.pdf?src-supplier=Digi-Key, ComponentLink9Description=https://datasheet.ciiva.com/11201/mmbt3906lt1-d-11201803.pdf?src-supplier=Avnet, ComponentLink9URL=https://datasheet.ciiva.com/11201/mmbt3906lt1-d-11201803.pdf?src-supplier=Avnet, ComponentLink10Description=https://datasheet.ciiva.com/4721/mmbt3906lt1-d-4721423.pdf?src-supplier=Mouser, ComponentLink10URL=https://datasheet.ciiva.com/4721/mmbt3906lt1-d-4721423.pdf?src-supplier=Mouser, Contact Plating=Tin,Matte, Element Configuration=Single, Gain Bandwidth Product=250MHz, Height=0.94mm, hFE Min=60, Lead Free="Lead Free", Length=2.9mm, Max Breakdown Voltage=40V, Max Frequency=250MHz, Number of Elements=1, Number of Pins=3, Packaging="Tape and Reel", Polarity=PNP, Power Dissipation=300mW, Pricing 1="1=0.13000, 10=0.09200, 25=0.08800, 100=0.04960, 500=0.03892, 1000=0.02703 (USD)", Radiation Hardening=No, REACH SVHC="No SVHC", RoHS=Yes, Stock 1=148812, Supplier 1=Digi-Key, Transition Frequency=250MHz, Width=1.3mm
R1: "Thick Film Resistor -  453Kohm, 1%, 0603", Case/Package=0603
R2 R4: "Thick Film Resistor -  100Kohm, 1%, 0603", Case/Package=0603
R3: "Thick Film Resistor -  100ohm, 1%, 0603", Case/Package=0603
R5 R7 R8 R9 R10: "Thick Film Resistor -  10Kohm, 1%, 0402", Case/Package=0402
R6: "Thick Film Resistor -  820ohm, 1%, 0603", Case/Package=0603
R11: "Thick Film Resistor -  220Kohm, 1%, 0603", Case/Package=0603
R12: "Thick Film Resistor -  309Kohm, 1%, 0603", Case/Package=0603
R13: "Thick Film Resistor -  1Mohm, 1%, 0402", Case/Package=0402
S2: library part 434153017835, "SWITCH TACTILE SPST-NO 0.05A 12V", Manufacturer="Wurth Electronics", Max Operating Temperature=85°C, Min Operating Temperature=-40°C, Operating Force=350gf, Actuator Material="Polymer,Liquid Crystal Polymer", ComponentLink1Description=https://datasheet.ciiva.com/52202/434153017835-52202871.pdf?src-supplier=Digi-Key, ComponentLink1URL=https://datasheet.ciiva.com/52202/434153017835-52202871.pdf?src-supplier=Digi-Key, Contact Material=Steel, DigiKey=732-10143-1-ND, Illumination Type=Non-Illuminated, Mechanical Life=200000Cycles, Mount="Surface Mount", P/N=434153017835, Packaging="Tape and Reel", Pricing 1="1=0.56000, 100=0.47150, 500=0.41400, 1000=0.33350 (USD)", RoHS=Yes, Stock 1=48125, Supplier 1=Digi-Key, Switch Function=Off-Mom, Switch Travel=0.15mm, Throw Configuration=SPST
S3: library part FSM14J, "Pushbutton 6x6mm, Actuator Height off PCB, Vertical 9.50mm", Digi-Key Part Number=MJTP1138BTUBE-ND, Manufacturer Part Number=MJTP1138BTUBE, Package=None, Availability=Unavailable, MF="TE Connectivity", MP=FSM14J, Price=None, SnapEDA_Link=https://www.snapeda.com/parts/FSM14J/TE%20Connectivity%20ALCOSWITCH%20Switches/view-part/?ref=snap
U1: "IC REG BOOST ADJ 3A SYNC 8MSOP", Case/Package=MSOP, Manufacturer 1=Diodes, Max Input Voltage=4.75V, Max Operating Temperature=85°C, Max Output Voltage=5V, Min Input Voltage=900mV, Min Operating Temperature=-40°C, Min Output Voltage=2.5V, Operating Supply Current=1uA, Output Current=3A, Package Quantity=2500, Switching Frequency=1MHz, ComponentLink1Description=http://www.mouser.com/ds/2/115/PAM2401-347378.pdf?src-supplier=Mouser, ComponentLink1URL=http://www.mouser.com/ds/2/115/PAM2401-347378.pdf?src-supplier=Mouser, ComponentLink2Description=https://www.diodes.com/assets/Datasheets/PAM2401.pdf?src-supplier=Digi-Key, ComponentLink2URL=https://www.diodes.com/assets/Datasheets/PAM2401.pdf?src-supplier=Digi-Key, ComponentLink3Description=http://diodes.com/datasheets/PAM2401.pdf?src-supplier=Avnet, ComponentLink3URL=http://diodes.com/datasheets/PAM2401.pdf?src-supplier=Avnet, DigiKey=PAM2401SCADJDICT-ND, Lead Free="Lead Free", Manufacturer Part Number=PAM2401SCADJ, Min Supply Voltage=900mV, Mount="Surface Mount", Number of Outputs=1, Number of Pins=8, Output Configuration=Positive, Output Type=Adjustable, Packaging="Tape and Reel", Pricing 1="1=0.99000, 10=0.88500, 25=0.84000, 100=0.64500, 250=0.57000, 500=0.54000, 1000=0.42000 (USD)", RoHS=Yes, Stock 1=42065, Supplier 1=Digi-Key, Synchronous Rectifier=Yes, Topology=Boost, Weight=0.004938oz
U2: "WiFi 802.11b/g/n Transceiver Module 2.4GHz", Case/Package=QFN-56, Manufacturer 1="Espressif Systems", Manufacturer Part Number=ESP32-S2FH4
U3: "SERIAL TIME CHIP 8PIN, SOIC", Case/Package=SOIC, Frequency=32.768kHz, Manufacturer 1=Maxim, Max Operating Temperature=70°C, Max Supply Voltage=5.5V, Min Operating Temperature=0°C, Min Supply Voltage=4.5V, Operating Supply Current=1.5mA, Operating Supply Voltage=5V, Package Quantity=100, ComponentLink1Description=https://datasheet.ciiva.com/20167/170004-da-en-01-20167204.pdf?src-supplier=Rapid+Electronics, ComponentLink1URL=https://datasheet.ciiva.com/20167/170004-da-en-01-20167204.pdf?src-supplier=Rapid+Electronics, ComponentLink2Description=https://datasheet.ciiva.com/1491/ds1307-1491905.pdf?src-supplier=Element14, ComponentLink2URL=https://datasheet.ciiva.com/1491/ds1307-1491905.pdf?src-supplier=Element14, ComponentLink3Description=https://datasheet.ciiva.com/1498/ds1307-1498866.pdf?src-supplier=Farnell, ComponentLink3URL=https://datasheet.ciiva.com/1498/ds1307-1498866.pdf?src-supplier=Farnell, ComponentLink4Description=https://datasheet.ciiva.com/1139/46359-1139142.pdf?src-supplier=Element14, ComponentLink4URL=https://datasheet.ciiva.com/1139/46359-1139142.pdf?src-supplier=Element14, ComponentLink5Description=https://datasheet.ciiva.com/14085/ds1307-14085608.pdf?src-supplier=Digi-Key, ComponentLink5URL=https://datasheet.ciiva.com/14085/ds1307-14085608.pdf?src-supplier=Digi-Key, ComponentLink6Description=https://datasheet.ciiva.com/3304/ds1307-3304457.pdf?src-supplier=Avnet, ComponentLink6URL=https://datasheet.ciiva.com/3304/ds1307-3304457.pdf?src-supplier=Avnet, ComponentLink7Description=https://datasheet.ciiva.com/14577/70127931-14577227.pdf?src-supplier=Allied+Electronics, ComponentLink7URL=https://datasheet.ciiva.com/14577/70127931-14577227.pdf?src-supplier=Allied+Electronics, Contact Plating=Tin,Matte, Date Format=YY-MM-DD, DigiKey=DS1307Z+-ND, Height=1.5mm, Interface=I2C,Serial,2-Wire, Lead Free="Lead Free", Length=5mm, Logic Function=Clock, Manufacturer Part Number=DS1307Z+, Memory Size=56B, Memory Type=RAM, Mount="Surface Mount", Number of Outputs=1, Number of Pins=8, Packaging=Rail/Tube, Pricing 1="1=3.82000, 10=3.43200, 25=3.24480, 100=2.81200, 250=2.66780, 500=2.39380, 1000=2.26500 (USD)", Radiation Hardening=No, REACH SVHC="No SVHC", RoHS=Yes, RoHS Compliant=Yes, Series=DS1307Z, Stock 1=492, Supplier 1=Digi-Key, Time Format=HH:MM:SS, Voltage=5V, Weight=0.019048oz, Width=4mm
X1: library part CRYSTAL_1_1, "40MHz ±10ppm 10pF 30Ω SMD-3225 SMD Crystal Resonators RoHS", Case/Package=SMD-3225, Frequency=40MHz, Manufacturer Part Number=7M40000049, ComponentLink1Description=https://datasheet.ciiva.com/3852/part27-3852098.pdf?src-supplier=Arrow+Electronics, ComponentLink1URL=https://datasheet.ciiva.com/3852/part27-3852098.pdf?src-supplier=Arrow+Electronics, ComponentLink2Description=https://datasheet.ciiva.com/852/p79e-852307.pdf?src-supplier=Digi-Key, ComponentLink2URL=https://datasheet.ciiva.com/852/p79e-852307.pdf?src-supplier=Digi-Key, ComponentLink3Description=https://datasheet.ciiva.com/852/p79e-852308.pdf?src-supplier=Digi-Key, ComponentLink3URL=https://datasheet.ciiva.com/852/p79e-852308.pdf?src-supplier=Digi-Key, ComponentLink4Description=https://datasheet.ciiva.com/1369/l0445e-1369908.pdf?src-supplier=Farnell, ComponentLink4URL=https://datasheet.ciiva.com/1369/l0445e-1369908.pdf?src-supplier=Farnell, ComponentLink5Description=https://datasheet.ciiva.com/852/p79e-852309.pdf?src-supplier=Digi-Key, ComponentLink5URL=https://datasheet.ciiva.com/852/p79e-852309.pdf?src-supplier=Digi-Key, ComponentLink6Description=https://datasheet.ciiva.com/1361/p79e-1361573.pdf?src-supplier=Element14, ComponentLink6URL=https://datasheet.ciiva.com/1361/p79e-1361573.pdf?src-supplier=Element14, ComponentLink7Description=https://datasheet.ciiva.com/1369/l0445e-1369909.pdf?src-supplier=Farnell, ComponentLink7URL=https://datasheet.ciiva.com/1369/l0445e-1369909.pdf?src-supplier=Farnell, ComponentLink8Description=https://datasheet.ciiva.com/1392/p79e-1392982.pdf?src-supplier=Newark, ComponentLink8URL=https://datasheet.ciiva.com/1392/p79e-1392982.pdf?src-supplier=Newark
Y1 Y2: library part XTAL, "Crystal Oscillator", LatestRevisionDate=17-Jul-2002, LatestRevisionNote="Re-released for DXP Platform.", P/N=X308032768KGB2SC, PackageDescription="Crystal, Thru-Hole; 2 Leads; Body 3.1 x 8.2 mm (Dia.xH)", PackageReference=R38, Published=8-Jun-2000, Publisher="Altium Limited"

## Free pads (board coordinates)
  round 3.5 hole 2: ""(2.97,34.53) ""(3.04,17.77) ""(41.67,3.52) ""(41.67,34.52)

## Via types
v1: diameter 0.457, hole 0.2, Top Layer to Bottom Layer, tented both sides, 366 vias
v2: diameter 0.7, hole 0.5, Top Layer to Bottom Layer, tented both sides, 9 vias
v3: diameter 0.457, hole 0.2, Top Layer to Bottom Layer, 2 vias

## Nets (pads, with @x,y where several pads share a name; then routed paths per layer and width w, separated by ;. In a path a pad name is that pad's centre, name@x,y a point inside that pad or via, vN(x,y) a via of type N, cw(c..) or ccw(c..) an arc to the next point about the centre after c; other vN are vias at no path point)
3V3: C1.2 C2.2 C6.2 C7.2 C8.2 C18.1 C19.1 C20.1 C24.1 C25.1 C26.1 D2.A L2.1 P3.6 Q2.3 R1.2 R5.2 R7.2 R8.2 R9.2 R10.1 U1.7 U2.1 U2.20 U2.27 U2.45 U2.51 U2.54 | length 15.2
  Top Layer w0.254: v1(10.875,12.825) 10.129,12.825 10.14,12.815 R9.2 R8.2 ; v1(13.043,14.311) 13.047,14.307 13.047,13.829 R7.2 ; v1(17.675,7.35) R5.2 ; v1(18.8,33.15) R10.1 ; U2.27 v1(21.168,31.66) ; v1(21.201,23.551) 21.26,23.551 21.566,23.857 U2.45 U2.45 ; v1(23.75,23.425) 23.75,23.507 23.955,23.713 U2.51@23.955,24.298 ; U2.20 23.97,31.013 23.97,31.447 24.138,31.615 24.16,31.615 24.312,31.767 v1(24.367,31.767) ; U2.54@25.174,24.304 25.174,23.683 25.325,23.532 v1(25.325,23.45)
  Bottom Layer w0.152: v1(23.75,23.425) 23.75,24.368 C19.1 ; C20.1 24.816,23.959 v1(25.325,23.45)
  Bottom Layer w0.254: R1.2 9.639,30.598 10.235,31.193 10.235,31.874 U1.7
  Bottom Layer w0.635: v1(21.201,23.551) 21.201,24.028 C18.1
  other v1: 16.818,11.5 17.834,11.5 18.85,11.5 19.866,11.5 18.85,12.516 19.866,12.516 15.652,19.641 16.668,19.641 17.684,19.641 18.7,19.641 15.652,20.657 16.668,20.657 17.684,20.657 18.7,20.657 18.025,24.4 19.041,24.4 26.775,24.5 18.025,25.416 19.041,25.416 18.025,27.8 19.041,27.8 18.025,28.816 19.041,28.816 29.825,32.775 30.841,32.775 29.825,33.791 30.841,33.791 8.509,34.718 9.525,34.718 29.825,34.807 30.841,34.807 8.509,35.734 9.525,35.734 10.541,35.734 29.825,35.823 30.841,35.823 6.477,36.75 7.493,36.75 8.509,36.75 9.525,36.75 10.541,36.75 11.557,36.75 12.573,36.75
+4.7: C15.1 C21.1 D3.K U3.8
Batt_Volt: C3.2 D1.1 L1.1 P1.1 P2.1 R11.2 U1.2 U1.3 U3.3 | length 32
  Bottom Layer w0.254: U1.2 10.431,28.12 10.431,28.73 16.051,34.35 19.7,34.35 21.05,33 27.908,33 29.267,31.641 R11.2
  Bottom Layer w0.762: v1(6.266,5.791) 8.216,5.791 11.43,9.005 U3.3
  other v1: 4.234,3.759 5.25,3.759 6.266,3.759 4.234,4.775 5.25,4.775 6.266,4.775 4.234,5.791 5.25,5.791
Battery_Voltage: R11.1 R12.2 U2.10 | length 4.3
  Top Layer w0.254: U2.10 26.72,28.663 27.538,28.663 v1(27.55,28.675)
  Bottom Layer w0.254: v1(27.55,28.675) 29.23,28.675 R12.2
  Bottom Layer w0.508: R12.2 R11.1
Boot: C11.2 P3.3 S1.2 U2.5 | length 28.3
  Top Layer w0.152: U2.5 26.767,26.709 27.129,26.709 27.474,27.055 v1(27.474,27.099)
  Top Layer w0.254: C11.2 29.372,14.816 S1.2 29.972,3.648 P3.3
  Bottom Layer w0.152: v1(27.474,27.099) 27.416,27.041 27.416,26.895 27.379,26.857 27.379,24.221 28.675,22.925 28.675,14.822 v1(28.669,14.816)
GND: A1.2 C1.1 C2.1 C3.1 C4.1 C5.1 C6.1 C7.1 C8.1 C9.2 C10.2 C11.1 C12.1 C13.1 C15.2 C16.1 C17.2 C18.2 C19.2 C20.2 C21.2 C22.1 C23.1 C24.2 C25.2 C26.2 P1.2 P3.1 Q1.4 Q3.3 R2.2 R4.2 R12.1 S1.1 S2.2 S2.4 S3.1 S3.2 U1.4 U1.8 U2.57 U3.4 X1.2 X1.4 | length 1.1
  Top Layer w0.254: v1(31.945,23.522) 32.024,23.522 32.308,23.238 A1.2
  other v1: 2.1,0.625 3.6,0.625 5.1,0.625 6.6,0.625 8.1,0.625 9.6,0.625 11.1,0.625 12.6,0.625 14.1,0.625 15.6,0.625 17.1,0.625 18.6,0.625 20.1,0.625 21.6,0.625 23.1,0.625 24.6,0.625 26.1,0.625 27.6,0.625 29.1,0.625 30.6,0.625 32.1,0.625 33.6,0.625 35.1,0.625 36.6,0.625 38.1,0.625 0.675,0.675 38.1,1.912 0.65,2.375 7.945,2.522 15.445,2.522 16.945,2.522 18.445,2.522 19.945,2.522 21.445,2.522 34.945,2.522 38.1,3.2 0.65,3.875 15.445,4.022 16.945,4.022 18.445,4.022 19.945,4.022 21.445,4.022 27.445,4.022 34.945,4.022 38.1,4.487 0.65,5.375 15.445,5.522 16.945,5.522 18.445,5.522 19.945,5.522 21.445,5.522 22.945,5.522 24.445,5.522 28.945,5.522 33.6,5.775 35.1,5.775 36.6,5.775 38.1,5.775 32,5.8 0.65,6.875 13.945,7.022 15.445,7.022 16.945,7.022 21.445,7.022 24.445,7.022 28.945,7.022 31.945,7.022 0.65,8.375 12.445,8.522 15.445,8.522 16.945,8.522 21.445,8.522 24.445,8.522 31.945,8.522 0.65,9.875 15.445,10.022 16.945,10.022 21.445,10.022 24.445,10.022 28.945,10.022 31.945,10.022 18.45,10.1 0.65,11.375 9.445,11.522 15.445,11.522 22.945,11.522 24.445,11.522 28.945,11.522 31.945,11.522 0.65,12.875 1.945,13.022 3.445,13.022 31.945,13.022 15.243,13.936 14.4,14.325 0.65,14.375 1.945,14.522 3.445,14.522 9.445,14.522 31.945,14.522 0.65,15.875 9.445,16.022 31.945,16.022 0.65,17.375 31.945,17.522 26.572,17.575 29.975,17.7 23.525,18.475 0.65,18.875 4.945,19.022 13.945,19.022 30.445,19.022 31.945,19.022 22.225,20.025 26.729,20.004 0.65,20.375 1.945,20.522 3.445,20.522 4.945,20.522 12.445,20.522 13.945,20.522 21.445,20.522 30.445,20.522 31.945,20.522 6.943,20.736 26.729,20.789 22.35,21.1 27.425,21.1 0.65,21.875 1.945,22.022 3.445,22.022 4.945,22.022 6.445,22.022 7.945,22.022 15.445,22.022 16.945,22.022 18.445,22.022 21.445,22.022 30.445,22.022 31.945,22.022 22.966,22.041 26.425,22.575 0.65,23.375 27.42,23.497 1.945,23.522 3.445,23.522 4.945,23.522 6.445,23.522 7.945,23.522 16.945,23.522 30.445,23.522 31.575,23.975 28.279,24.004 28.731,24.75 29.538,24.75 30.344,24.75 31.15,24.75 27.861,24.825 0.65,24.875 1.945,25.022 3.445,25.022 4.945,25.022 6.445,25.022 7.945,25.022 15.445,25.022 16.8,26.05 15.425,26.1 28.688,26.175 29.494,26.175 30.3,26.175 31.106,26.175 31.912,26.175 0.65,26.375 1.945,26.522 3.445,26.522 4.945,26.522 6.445,26.522 7.945,26.522 30.1,27 31.925,27 0.65,27.875 16.8,27.975 1.945,28.022 3.445,28.022 4.945,28.022 6.445,28.022 7.945,28.022 15.445,28.022 31.945,28.022 31.945,28.022 0.65,29.375 28.125,29.5 1.945,29.522 3.445,29.522 4.945,29.522 6.445,29.522 7.945,29.522 9.445,29.522 12.445,29.522 13.945,29.522 15.445,29.522 31.945,29.522 16.9,29.9 28.125,30.75 0.65,30.875 1.945,31.022 3.445,31.022 4.945,31.022 6.445,31.022 13.945,31.022 15.445,31.022 16.945,31.022 27.445,31.022 31.945,31.022 28.025,31.95 0.65,32.375 1.945,32.522 4.945,32.522 6.445,32.522 12.445,32.522 15.445,32.522 16.945,32.522 18.445,32.522 31.945,32.522 29.05,32.875 21.55,33.675 24.525,33.675 0.65,33.875 6.445,34.022 12.445,34.022 13.945,34.022 25.945,34.022 27.445,34.022 28.945,34.022 31.945,34.022 0.65,35.375 4.945,35.522 6.445,35.522 12.445,35.522 13.945,35.522 15.445,35.522 16.945,35.522 18.445,35.522 19.945,35.522 21.445,35.522 24.445,35.522 25.945,35.522 27.445,35.522 28.945,35.522 31.945,35.522 0.65,36.875 1.945,37.022 3.445,37.022 4.945,37.022 13.945,37.022 15.445,37.022 16.945,37.022 18.445,37.022 19.945,37.022 21.445,37.022 22.945,37.022 24.445,37.022 25.945,37.022 27.445,37.022 28.945,37.022 30.445,37.022 31.945,37.022 0.65,38.375 2.15,38.375 3.425,38.375 4.925,38.375 6.425,38.375 7.925,38.375 9.425,38.375 10.925,38.375 12.425,38.375 13.925,38.375 15.425,38.375 16.925,38.375 18.425,38.375 19.925,38.375 21.425,38.375 22.925,38.375 24.425,38.375 25.925,38.375 27.425,38.375 28.925,38.375 30.425,38.375 31.925,38.375
  other v2: 21.971,26.264 23.368,26.264 24.765,26.264 21.971,27.661 23.368,27.661 24.765,27.661 21.971,29.058 23.368,29.058 24.765,29.058
Motor_Signal: R3.2 U2.39 | length 24.2
  Top Layer w0.152: R3.2@4.49,11.057 4.49,13.04 v1(9.55,18.1) ; v1(13.175,19.2) 13.175,21.248 18.138,26.212 19.969,26.212 U2.39@20.012,26.254
  Bottom Layer w0.152: v1(9.55,18.1) 9.567,18.1 10.667,19.2 v1(13.175,19.2)
NetA1_1: A1.1 C12.2 L3.1 | length 2.6
  Top Layer w0.254: L3.1@30.344,25.4 30.419,25.475 C12.2@31.6,25.475 ; C12.2@31.6,25.475 A1.1
NetC4_2: C4.2 U2.53 X1.1 | length 3.6
  Top Layer w0.152: U2.53 24.768,22.732 C4.2
  Top Layer w0.254: C4.2 24.925,21.675 24.927,21.673 24.927,21.548 25.375,21.1 X1.1
NetC5_2: C5.2 U2.52 X1.3 | length 5.7
  Top Layer w0.152: X1.3 23.425,19.5 24.375,20.45 24.375,22.125 C5.2 24.362,23.012 U2.52@24.362,24.304
NetC9_1: C9.1 L2.2 U2.3 U2.4
NetC13_2: C13.2 L3.2 U2.2 | length 2.8
  Top Layer w0.293: U2.2 26.719,25.462 28.213,25.462 C13.2@28.275,25.4 ; C13.2 L3.2
NetC14_1: C14.1 D2.K D3.A
NetC14_2: C14.2 Q2.2 Q3.2 | length 12.6
  Top Layer w0.508: v1(18.225,14.55) v1(18.725,14.55) v1(21.55,14.55) v1(22.075,14.55)
  Bottom Layer w0.508: v1(18.225,14.55) v1(18.725,14.55) 19.215,14.55 Q2.2 19.284,14.619 19.284,14.869 19.984,15.568 21.863,15.568 Q3.2@22.555,14.876 ; v1(21.55,14.55) v1(22.075,14.55) 22.601,14.55 Q3.2 22.616,14.815 Q3.2@22.555,14.876 ; C14.2 Q3.2@22.555,14.876
NetC22_2: C22.2 R13.1 U2.21 Y2.1 | length 5
  Top Layer w0.152: Y2.1 cw(c22.875,35) 23.525,35 C22.2 R13.1 23.547,32.054 23.547,31.032 U2.21
NetC23_2: C23.2 R13.2 U2.22 Y2.2 | length 4.3
  Top Layer w0.152: Y2.2 22.875,34.838 ccw(c22.875,34.488) 22.525,34.488 C23.2 22.525,32.025 23.119,31.431 23.119,31.059 U2.22
NetD1_2: D1.2 P2.2 Q1.1 Q1.2 Q1.5 Q1.6
NetL1_2: L1.2 U1.1
NetQ1_3: Q1.3 R3.1 R4.1
NetQ2_1: Q2.1 Q3.1 R6.1 | length 9.2
  Bottom Layer w0.254: Q2.1@17.338,14.498 18.361,13.475 19.701,13.475 20.629,14.402 20.716,14.49 20.716,14.315 20.889,14.142 21.631,13.4 23.262,13.4 24.01,14.149 24.01,14.705 R6.1
NetR1_1: R1.1 R2.1 U1.5 | length 3.3
  Bottom Layer w0.254: R2.1 R1.1 9.017,31.988 U1.5
NetR10_2: R10.2 U2.24 | length 3.2
  Top Layer w0.152: R10.2 20.275,33.1 21.125,32.25 21.491,32.25 22.319,31.422 22.319,31.284 22.368,31.236 U2.24
NetU3_1: U3.1 Y1.2 | length 3.3
  Bottom Layer w0.152: Y1.2 ccw(c13.157,9.404) 13.97,9.404 U3.1
NetU3_2: U3.2 Y1.1 | length 2.3
  Bottom Layer w0.152: U3.2 12.7,9.849 ccw(c13.157,9.849) Y1.1
RESET: C10.1 P3.2 R5.1 S2.1 S2.3 U2.56 | length 37.5
  Top Layer w0.152: R5.1 19.099,8.85 19.356,9.107 22.706,9.107 22.738,9.075 24.85,9.075 ; U2.56 26.017,24.262 26.017,23.988 27.055,22.95 C10.1@27.229,22.776 ; C10.1@27.427,22.598 27.885,22.598 28.138,22.346 28.138,17.805 27.125,16.793 27.125,11.35 24.85,9.075 ; v1(28.9,9.075) 24.85,9.075
  Bottom Layer w0.152: v1(28.9,9.075) 29.925,8.05 29.925,6.235 P3.2
Rx: P3.4 U2.49 | length 24.1
  Top Layer w0.152: v1(23.05,23.325) 23.05,23.407 23.168,23.525 U2.49@23.168,24.239
  Bottom Layer w0.152: v1(23.05,23.325) 23.058,23.317 23.058,22.992 27.65,18.4 27.65,5.091 28.63,4.111 P3.4
SCL: R8.1 U2.38 U3.6 | length 21.5
  Top Layer w0.152: v1(11.45,15.825) 11.45,15.907 11.325,16.032 11.325,24.6 13.386,26.661 U2.38
  Top Layer w0.254: R8.1@11.45,13.698 v1(11.45,15.825)
  Bottom Layer w0.254: U3.6 11.44,16.838 11.44,15.835 v1(11.45,15.825)
SDA: R9.1 U2.37 U3.5 | length 22.8
  Top Layer w0.152: v1(10.15,15.8) 10.15,15.817 10.425,16.092 10.425,24.95 12.542,27.067 U2.37@20.012,27.067
  Top Layer w0.254: R9.1 v1(10.15,15.8)
  Bottom Layer w0.254: v1(10.15,15.8) 10.155,15.805 10.155,16.843 U3.5
SQ_OUT: R6.2 U2.42 | length 12.4
  Top Layer w0.152: U2.42 20.018,17.407 21.125,16.3 v1(23.5,16.3)
  Bottom Layer w0.152: v1(23.5,16.3) 24.066,16.3 24.141,16.375 24.216,16.3 R6.2
Tx: P3.5 U2.48 | length 23.7
  Top Layer w0.152: v1(22.25,23.35) 22.719,23.819 22.719,24.262 U2.48
  Bottom Layer w0.152: v1(22.25,23.35) 22.25,22.075 26.09,18.235 P3.5
VDD_SPI: C17.1 U2.30 | length 1.6
  Top Layer w0.254: C17.1 18.439,29.861 U2.30
WIFI: C16.2 R7.1 S3.3 S3.4 U2.28 | length 38.1
  Top Layer w0.152: R7.1 C16.2 15.121,12.825 15.388,13.092 17.281,13.092 18.015,13.825 24.048,13.825 24.781,13.092 S3.4 25.15,13.21 v3(25.15,14.175) ; v3(19.255,31.73) 20.273,31.73 20.768,31.236 U2.28
  Bottom Layer w0.152: v3(19.255,31.73) 19.23,31.73 17.415,29.915 17.415,24.237 20.613,21.039 21.61,21.039 22.032,20.618 22.315,20.618 25.15,17.782 v3(25.15,14.175)
pads on no net: U1.6 U2.6 U2.7 U2.8 U2.9 U2.11 U2.12 U2.13 U2.14 U2.15 U2.16 U2.17 U2.18 U2.19 U2.23 U2.25 U2.26 U2.29 U2.31 U2.32 U2.33 U2.34 U2.35 U2.36 U2.40 U2.41 U2.43 U2.44 U2.46 U2.47 U2.50 U2.55 U3.7

## Polygon pours and split planes (outlines as drawn)
GND on Bottom Layer "GND_L04_P000" (solid, remove dead copper, pour order 0): 0.018,39.011 32.243,39.011 32.243,6.161 38.55,6.161 38.55,0 0,0
GND on GND "GND_L02_P001" (solid, pour order 1): 0.018,39.011 32.243,39.011 32.243,6.161 38.55,6.161 38.55,0 0,0
3V3 on Power "3V3_L03_P004" (solid, pour order 4): 0.018,39.011 32.243,39.011 32.243,6.161 38.55,6.161 38.55,0 0,0
GND on Top Layer "GND_L01_P003" (solid, remove dead copper, pour order 3): 0.018,39.011 32.243,39.011 32.243,6.161 38.55,6.161 38.55,0 0,0

## Other copper
Top Layer:
  pour cut-out: 14.829,12.397 13.529,12.397 13.529,13.253 15.183,13.253 15.1,13.17 15.1,12.575
  pour cut-out: 9.672,12.397 9.672,14.253 10.622,14.253 10.628,14.247 10.628,12.397
  region net NetD1_2: 1.575,2.25 2.075,1.75 3.275,1.75 3.581,2.056 3.581,8.094 2.975,8.7 2.975,11.55 2.714,11.811 1.961,11.811 1.575,11.425
  region net Batt_Volt: 3.886,2.064 3.886,8.103 4.445,8.661 6.528,8.661 6.629,8.56 6.629,2.079 6.3,1.75 4.2,1.75
  pour cut-out: 26.85,25.275 27.459,25.281 27.459,24.412 26.926,23.879 26.926,22.842 25.194,22.842 25.009,23.027 25.009,23.449
  pour cut-out: 17.197,7.422 17.197,9.278 18.147,9.278 18.153,9.272 18.153,7.422
  pour cut-out: 11.122,12.397 11.122,14.253 12.072,14.253 12.078,14.247 12.078,12.397
  pour cut-out: 12.572,12.397 12.572,14.253 13.522,14.253 13.528,14.247 13.528,12.397
  pour cut-out: 20.875,23.95 20.875,22.875 23.375,22.875 23.375,22.15 23.384,22.141 23.992,22.141 23.992,22.642 24.362,23.012 24.362,23.658
  pour cut-out: 18.847,33.628 20.703,33.628 20.703,32.678 20.697,32.672 18.847,32.672
  pour cut-out: 26.4,30.675 26.4,24.65 20.35,24.65 20.35,30.675
  region net 3V3: 26.375,25.05 27.075,25.05 27.175,24.95 27.175,24.425 26.925,24.175 26.6,24.175 26.375,24.4
  region net 3V3: 29.191,27.996 29.287,27.9 30.45,27.9 31.175,28.625 31.175,35.95 30.925,36.2 29.675,36.2 29.5,36.025 29.5,31.21 29.191,30.925
  region net NetC9_1: 26.375,25.825 26.375,26.375 27.325,26.375 28.275,27.325 28.275,28.454 28.421,28.6 28.852,28.6 28.95,28.502 28.95,26.85 28.775,26.675 28.525,26.675 27.675,25.825
  region net NetQ1_3: 3.244,9.968 3.473,10.196 6.953,10.196 7.207,9.942 7.207,9.104 6.953,8.85 3.447,8.85 3.244,9.053
Bottom Layer:
  region net 3V3: 8.2,34.65 8.2,35.725 7.6,36.325 6.05,36.325 5.725,36.65 5.725,37.175 6.1,37.55 12.875,37.55 13.2,37.225 13.2,36.35 12.9,36.05 11.225,36.05 10.85,35.675 10.85,33.025 10.575,32.75 10.575,31.275 10.1,31.275 10.1,32.75
  pour cut-out: 28.684,31.785 28.684,28.011 29.939,28.011 29.939,32.09
  pour cut-out: 13.178,12.401 13.492,12.401 13.67,12.223 13.67,12.056 13.121,12.056 13.178,12.113
  pour cut-out: 6.84,34.281 6.84,30.015 9.496,30.015 9.859,30.378 9.85,30.387 9.85,32.7
  pour cut-out: 24.025,16.875 22.8,16.875 22.8,13.825 24.341,13.825 24.834,14.318 24.834,16.873
  pour cut-out: 25.75,23.225 25.525,23 21.485,23 21.4,23.085 21.4,23.925 25.75,23.925
  region net 3V3: 23.725,30.775 24.8,30.775 25.15,31.125 25.15,31.875 24.825,32.2 24.8,32.175 20.375,32.175 17.643,29.443 17.643,24.332 18.05,23.925 26.825,23.925 27.15,24.25 27.15,25.675 27,25.825 26.55,25.825 26.45,25.725 26.45,24.95 26.275,24.775 21.35,24.775 20.55,25.575 20.55,30.55 20.775,30.775
  region net 3V3: 16.525,12.55 16.95,12.975 19.925,12.975 20.25,12.65 20.25,11.425 19.975,11.15 16.75,11.15 16.525,11.375
  region net 3V3: 15.55,21.05 18.9,21.05 19.25,20.7 19.25,18.625 18.575,17.95 16.55,17.95 15.2,19.3 15.2,20.7
  region net NetC14_1: 19.6,18.975 20.125,19.5 22.25,19.5 22.975,18.775 22.975,17.975 22.825,17.825 22.05,17.825 21.625,17.4 21.625,16.375 21.25,16 20.05,16 19.6,16.45
  region net +4.7: 14.65,15.725 15.175,15.2 15.175,14.65 15.325,14.5 16.125,14.5 16.275,14.65 16.275,14.825 17.175,15.725 18.025,15.725 18.375,16.075 18.375,17.225 17.975,17.625 16.875,17.625 16.25,17 15.2,17 14.525,17.675 14.375,17.825 13.625,17.825 13.475,17.675 13.475,16.025 13.775,15.725
  region net NetL1_2: 10.775,28.675 10.775,22.15 11.4,21.525 13.65,21.525 14.425,22.3 14.425,27.325 13.075,28.675
  region net Batt_Volt: 5.969,16.942 5.969,18.163 8.364,20.523 8.364,26.495 8.691,26.822 9.296,26.822 9.449,26.975 9.449,28.702 9.474,28.727 10.541,28.727 10.541,19.716 8.966,18.141 8.966,10.566 14.503,5.029 14.503,1.878 14.275,1.65 11.4,1.65 11.201,1.849 11.201,3.226 10.058,4.369 8.103,4.369 6.629,2.896 6.629,2.029 6.325,1.725 4.125,1.725 3.886,1.964 3.886,14.859

## Silkscreen, mask and mechanical layers (free items; w line width, h text height)
Top Overlay:
  text "TERRA SPRAY" at 40.425,24.325 h2.5 r270
  text "." at 26.454,21.129 h1.52
  text "K" at 8.179,6.829 h1.27
  text "+" at 12.104,3.642 h1.27
  text "TX" at 25.402,3.627 h0.64
  text "RX" at 28.027,3.602 h0.64
  text "BOOT" at 29.952,3.602 h0.64
  text "RST" at 32.902,3.577 h0.64
  text "GND" at 35.602,3.552 h0.64
  text "+3.3V" at 21.7,3.525 h0.64
  text "-" at 9.629,3.469 h1.27
  text "+" at 4.579,0.667 h1.27
  text "-" at 2.104,0.494 h1.27
Mechanical 3:
  the board outline again, w0.127

## Dimensions
0,0 to 0,39.03 on Mechanical 2
0,39.03 to 45.2,39.03 on Mechanical 2

## Text inside footprints (layer, text, board x,y; h text height)
P3: Bottom Overlay "1   2   3   4   5   6" at 37.744,3.937 h2.1